# Altium PCB PCB1.PcbDoc
Units mil, origin at the board's own origin, x right, y up, seen from the top; angles counter-clockwise.
Board outline 8140 x 3030 mil, 2 copper layers (Top Layer, Bottom Layer); 79 components, 76 nets, 312 pads, 10 vias.
Unrouted connection lines stored in the file: 2.
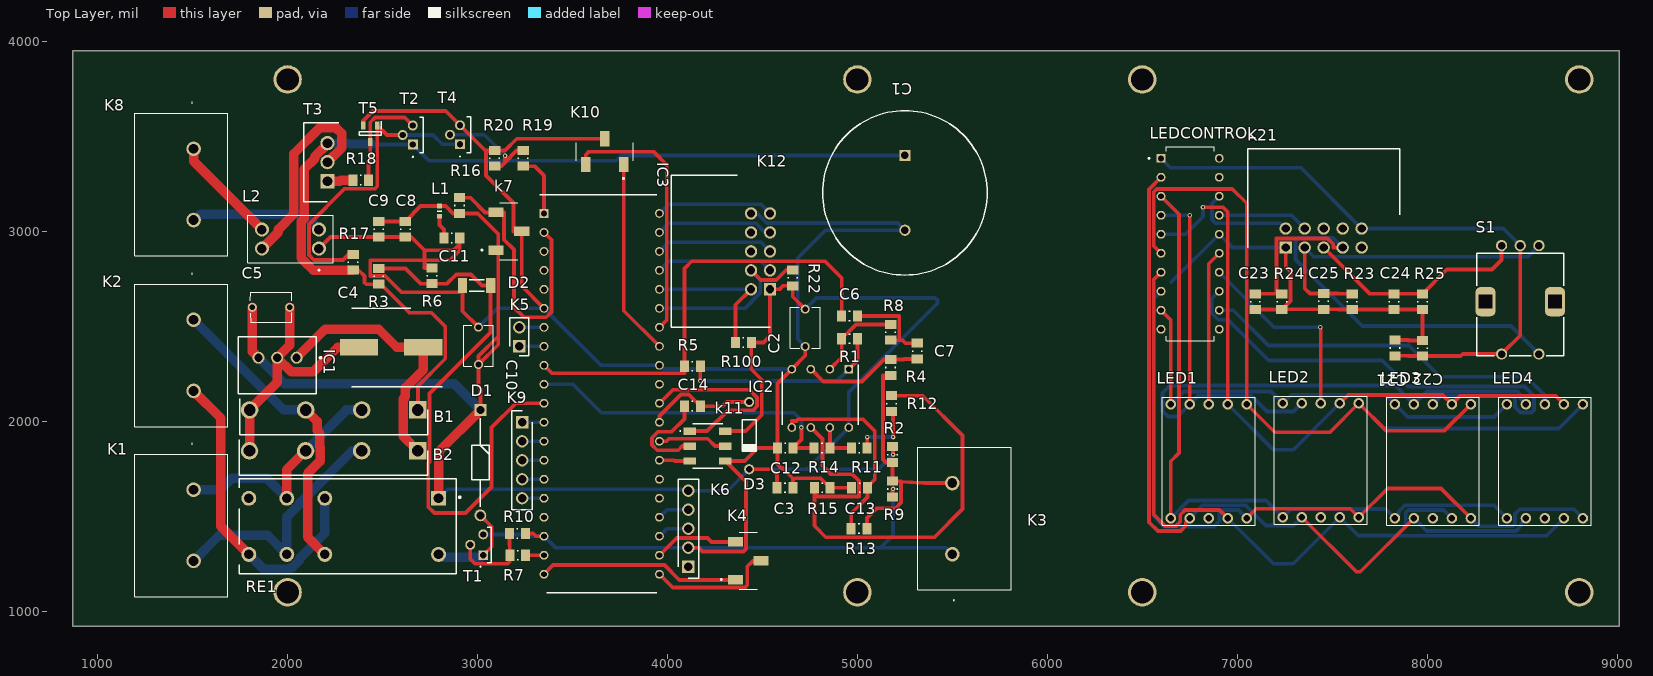
[diagram p0: Top Layer view]
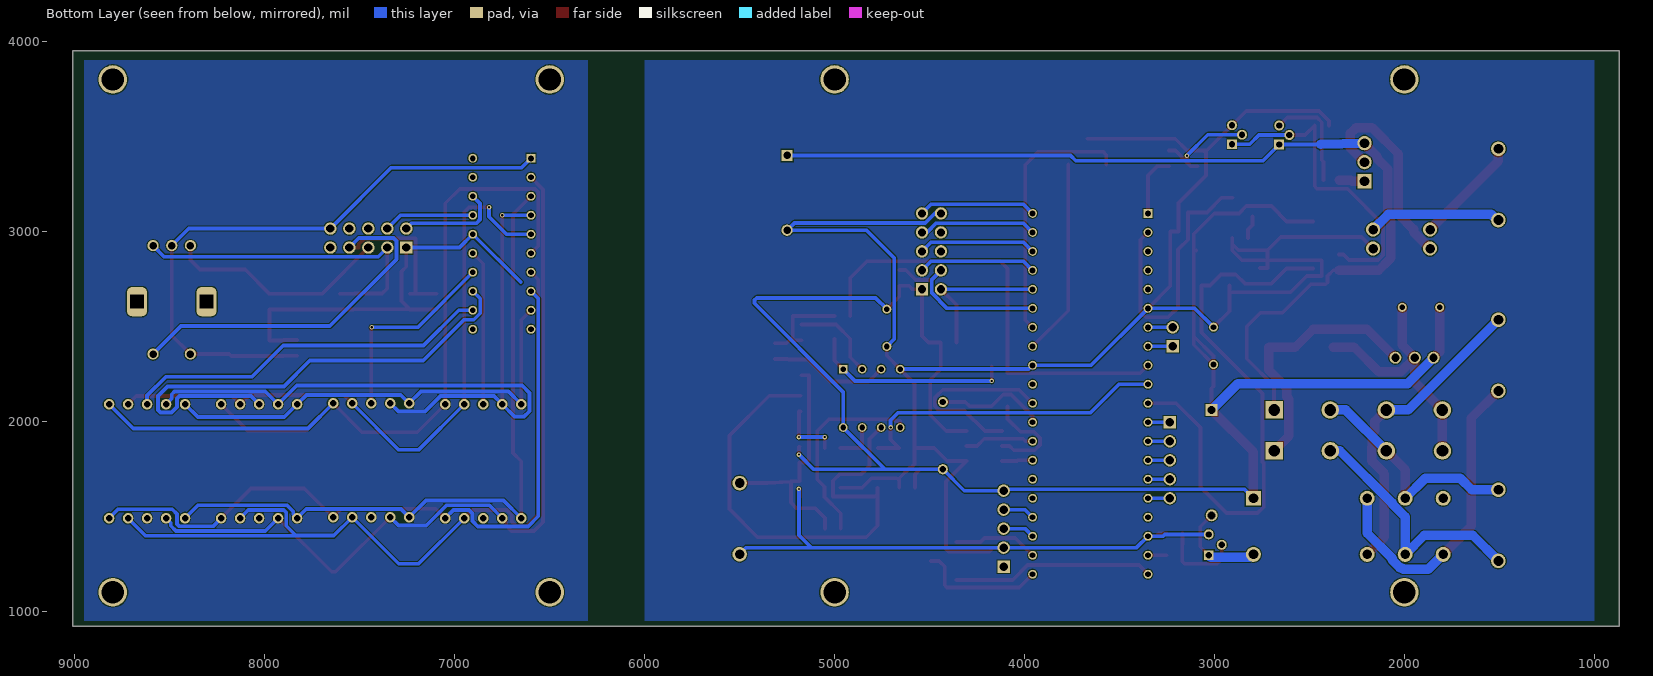
[diagram p1: Bottom Layer view, seen from below]
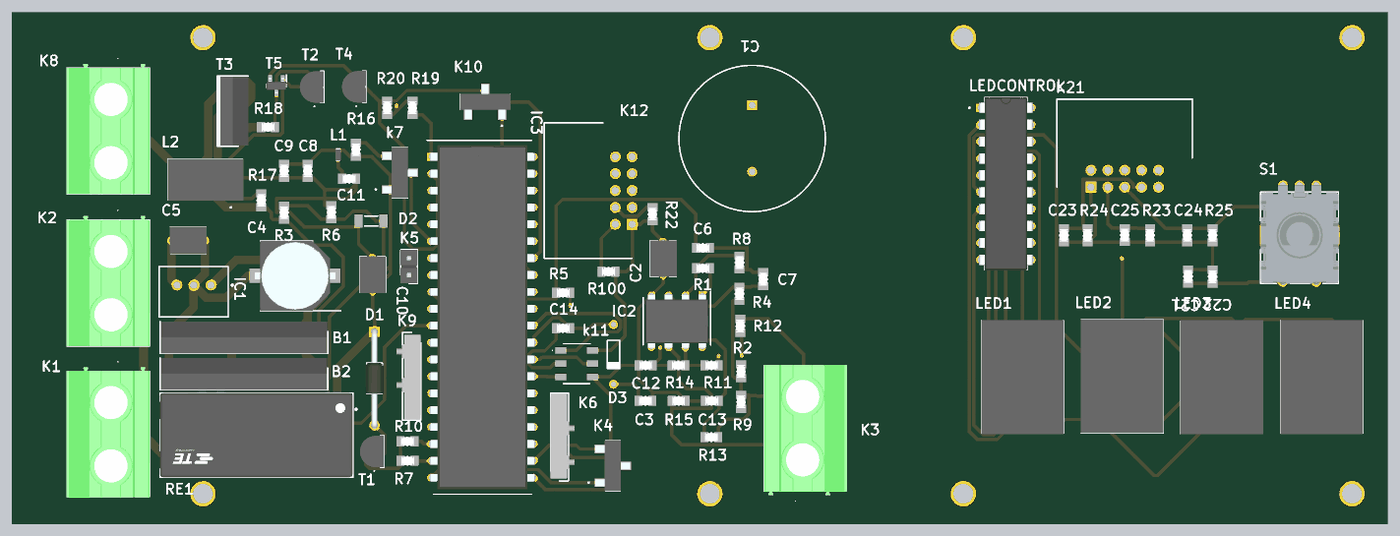
[diagram p2: 3D render of the assembled board from above, using the file's embedded part models]

## Layer stack, top to bottom
Top Solder: solder mask 0.4, Solder Resist, Dk 3.5
Top Layer: signal copper 1.4
Dielectric 1: dielectric 12.6, FR-4, Dk 4.8
Bottom Layer: signal copper 1.4
Bottom Solder: solder mask 0.4, Solder Resist, Dk 3.5

## Board outline
870,920 9010,920 9010,3950 870,3950

## Design rules (kind name [scope] priority, off if disabled: settings)
BoardOutlineClearance [All] p1: gap=7.87 ignorepadtopadclearanceinfootprint=FALSE
Clearance [All] p1: gap=5 ignorepadtopadclearanceinfootprint=FALSE except(9.84: Arc-Hole Track-Hole SMDPad-Hole THPad-Hole Via-Hole Fill-Hole Poly-Hole Region-Hole Text-Hole)
ComponentClearance [All] p1: gap=5 collisioncheckmode=3 verticalgap=5 showdistances=TRUE
DiffPairsRouting [All] p1: maxlimit=10 minlimit=5 mostfreqgap=5 toplayer_minwidth=5 toplayer_maxwidth=1000 toplayer_prefwidth=5 bottomlayer_minwidth=5 bottomlayer_maxwidth=1000 bottomlayer_prefwidth=5 maxuncoupledlength=500
Height [All] p1: minheight=0 maxheight=71497.94 prefheight=500
HoleSize [All] p1: absolutevalues=TRUE maxlimit=248.03 minlimit=11.81 maxpercent=80.000 minpercent=20.000
HoleToHoleClearance [All] p1: gap=9.84 allowstackedmicrovias=FALSE
MinimumAnnularRing [All] p1: minimumring=3
MinimumSolderMaskSliver [All] p1: minsoldermaskwidth=0
PlaneClearance [All] p1: clearance=5
PlaneConnect PlaneConnectPowerPads [InPadClass('PowerPads')] p1: planeconnectstyle=Direct reliefexpansion=20 reliefentries=4 reliefconductorwidth=10 reliefairgap=10
PlaneConnect [All] p2: pad.planeconnectstyle=Relief pad.reliefexpansion=11.81 pad.reliefentries=4 pad.reliefconductorwidth=5 pad.reliefairgap=5 via.planeconnectstyle=Direct via.reliefexpansion=11.81 via.reliefentries=4 via.reliefconductorwidth=5 via.reliefairgap=5
PolygonConnect PolygonConnectPowerPads [All vs (InPadClass('PowerPads'))] p1: connectstyle=Direct reliefconductorwidth=10 reliefentries=4 polygonreliefangle="90 Angle" airgapwidth=10
PolygonConnect [All] p2: thpad.connectstyle=Relief thpad.reliefconductorwidth=5 thpad.reliefentries=4 thpad.polygonreliefangle="90 Angle" thpad.airgapwidth=5 smdpad.connectstyle=Relief smdpad.reliefconductorwidth=5 smdpad.reliefentries=4 smdpad.polygonreliefangle="90 Angle" smdpad.airgapwidth=5 via.connectstyle=Direct via.reliefconductorwidth=5 via.reliefentries=4 via.polygonreliefangle="90 Angle" via.airgapwidth=5
RoutingVias [All] p1: holewidth=11.81 width=23.62 viastyle="Through Hole" minholewidth=11.81 minwidth=23.62 maxholewidth=23.62 maxwidth=259.84
SilkToSilkClearance [All] p1: silktosilkclearance=0
SilkToSolderMaskClearance [IsPad] p1: minsilkscreentomaskgap=5 clearancetoexposedcopper=TRUE
SolderMaskExpansion [All] p1: expansion=2.95 istentingtop=FALSE
Width [All] p1: maxlimit=1000 minlimit=15 preferedwidth=20 minimp=50.000000 maximp=50.000000 favimp=50.000000
20 further rules are at their usual default settings.

## Classes and differential pairs
component class led: C21 C22 C23 C24 C25 K21 LED1 LED2 LED3 LED4 LEDCONTROL R23 R24 R25 S1
component class input: B1 B2 C1 C4 C5 D1 D2 IC1 K1 K2 R3 R6 R7 R10 RE1 T1
component class controller: C8 C9 C10 C11 C14 D3 IC3 K4 K5 K6 k7 K9 K10 k11 K12 L1 R16 R21 R22 R100
component class bout: 12 C2 C3 C6 C7 C12 C13 IC2 K3 K8 L2 R1 R2 R4 R5 R8 R9 R11 R12 R13 R14 R15 R17 R18 R19 R20 T2 T3 T4 T5

## Components (designator, comment, footprint, x,y, rotation, side; value= is the part's Value field where it differs from the comment)
B1 "KBJ608G" TO750P480X2500X1900-4P 2685.83,2060 r180 top
B2 "KBJ608G" TO750P480X2500X1900-4P 2685.28,1845 r180 top
C1 "4700u 50V" CAPPRD1000W80D2200H3700 5250,3400 r270 top
C2 "10uF" RCE7U2J103J3K1H03B 4725,2590 r270 top
C3 "100n" FP-CRCW0805-e3-IPC_A 4618.63,1650 r0 top
C4 "100uF" CAPAE1050X1050N 2545,2390 r180 top
C5 "10uF" RCE7U2J103J3K1H03B 1815,2600 r0 top
C6 "10n" FP-CRCW0805-e3-IPC_A 4958.63,2555 r0 top
C7 "10n" FP-CRCW0805-e3-IPC_A 5315,2370 r90 top
C8 "100n" FP-CRCW0805-e3-IPC_A 2620,3011.37 r270 top
C9 "100n" FP-CRCW0805-e3-IPC_A 2480,3011.37 r270 top
C10 "10uF" RCE7U2J103J3K1H03B 3005,2300 r90 top
C11 "100n" FP-CRCW0805-e3-IPC_A 2865,2965 r0 top
C12 "10n" FP-CRCW0805-e3-IPC_A 4620,1860 r180 top
C13 "10n" FP-CRCW0805-e3-IPC_A 5011.37,1650 r180 top
C14 "100n" FP-CRCW0805-e3-IPC_A 4131.37,2080 r180 top
C21 "100n" FP-CRCW0805-e3-IPC_A 7830,2386.37 r270 top
C22 "100U 50V" FP-CRCW0805-e3-IPC_A 7975,2385 r270 top
C23 "10n" FP-CRCW0805-e3-IPC_A 7095,2630 r90 top
C24 "10n" FP-CRCW0805-e3-IPC_A 7825,2630 r90 top
C25 "10n" FP-CRCW0805-e3-IPC_A 7455,2631.37 r90 top
D1 "1N4007" DIOAD1408W86L464D236 3015,2060.12 r270 top
D2 "TZMC5V1-GS08" TZMC5V1GS08 2995,2715 r180 top
D3 "1N4148" NXP-SOD27-2_V 4430,1925 r270 top
IC1 "OKI-78SR-5/1.5-W36-C" MURA-OKI-78SR-3 1945,2335 r180 top
IC2 "MCP6002-I_P" DIP781W56P254L950H533Q8N 4805,2121.26 r270 top
IC3 "ATMEGA4809-PF" DIP1543W58P254L5175H635Q40N 3653.74,2145 r0 top
K1 "1714971" 1714971 1505,1640 r270 top
K2 "1714971" 1714971 1505,2534.8 r270 top
K3 "1714971" 1714971 5500,1300.2 r90 top
K4 "10129380-903001ALF" 10129380903001ALF 4425,1265 r90 top
K5 "M20-9990245" HDRV2W64P0X254_1X2_508X254X864P 3220,2395 r90 top
K6 "825433-5" HDRV5W63P0X254_1X5_1270X254X970P 4110,1235 r90 top
k7 "10129380-903001ALF" 10129380903001ALF 3165,3000 r90 top
K8 "1714971" 1714971 1505,3434.8 r270 top
K9 "825433-5" HDRV5W63P0X254_1X5_1270X254X970P 3235,1995 r270 top
K10 "10129380-903001ALF" 10129380903001ALF 3670,3420 r180 top
k11 "M22-5320305R" M225320305R 4211.5,1870 r270 top
K12 "61201021721" SHDRRA10W64P254X254_2X5_2036X885X910P 4540,2695 r90 top
K21 "61201021721" SHDRRA10W64P254X254_2X5_2036X885X910P 7255,2915 r0 top
L1 "LQM18FN1R0M00D" LQM18FN100M00D 2800,3106.57 r90 top
L2 "CM2545X171B-10" CM2545X171B10 2165,2910 r90 top
LED1 "HDSP-511A" HDSP511A 7050,2090 r180 top
LED2 "HDSP-511A" HDSP511A 7640,2095 r180 top
LED3 "HDSP-511A" HDSP511A 8230,2090 r180 top
LED4 "HDSP-511A" HDSP511A 8820,2090 r180 top
LEDCONTROL "TM1637" DIP778W43P254L2612H431Q20N 6751.85,2935 r0 top
R1 "18K" FP-CRCW0805-e3-IPC_A 4958.63,2435 r180 top
R2 "1M" FP-CRCW0805-e3-IPC_A 5185,1825 r270 top
R3 "4,7K" FP-CRCW0805-e3-IPC_A 2480,2763.63 r270 top
R4 "5K6" FP-CRCW0805-e3-IPC_A 5175,2283.63 r270 top
R5 "5K6" FP-CRCW0805-e3-IPC_A 4131.37,2290 r0 top
R6 "10K" FP-CRCW0805-e3-IPC_A 2760,2766.37 r90 top
R7 "10K" FP-CRCW0805-e3-IPC_A 3211.37,1295 r0 top
R8 "100" FP-CRCW0805-e3-IPC_A 5175,2468.63 r270 top
R9 "10M" FP-CRCW0805-e3-IPC_A 5185,1643.63 r270 top
R10 "4.7K" FP-CRCW0805-e3-IPC_A 3210,1410 r0 top
R11 "18K" FP-CRCW0805-e3-IPC_A 5010,1860 r0 top
R12 "18K" FP-CRCW0805-e3-IPC_A 5180,2093.63 r90 top
R13 "5K6" FP-CRCW0805-e3-IPC_A 5008.63,1435 r0 top
R14 "5K6" FP-CRCW0805-e3-IPC_A 4813.63,1860 r0 top
R15 "100" FP-CRCW0805-e3-IPC_A 4815,1650 r0 top
R16 "1M" FP-CRCW0805-e3-IPC_A 2905,3136.37 r270 top
R17 "4K7" FP-CRCW0805-e3-IPC_A 2345,2837 r90 top
R18 "100" FP-CRCW0805-e3-IPC_A 2385,3270 r180 top
R19 "10K" FP-CRCW0805-e3-IPC_A 3240,3385 r90 top
R20 "4K7" FP-CRCW0805-e3-IPC_A 3090,3385 r90 top
R22 "4,7K" FP-CRCW0805-e3-IPC_A 4660,2755 r270 top
R23 "10K" FP-CRCW0805-e3-IPC_A 7605,2630 r90 top
R24 "10K" FP-CRCW0805-e3-IPC_A 7235,2630 r90 top
R25 "10K" FP-CRCW0805-e3-IPC_A 7975,2630 r90 top
R100 "10K" FP-CRCW0805-e3-IPC_A 4400,2415 r0 top
RE1 "RT424005F" FP-RT424005F-MFG 2316.65,1447.36 r180 top
S1 "482009514001" 4820xx514001 8490,2630 r90 top
T1 "BC547CBU" BC547CBU#1 3015,1300 r90 top
T2 "BC547CBU" BC547CBU#2 2659.15,3458 r90 top
T3 "IRF9Z34NPBF" TO254P469X1042X1967-3P 2210,3265 r90 top
T4 "BC547CBU" BC547CBU#2 2908,3459 r90 top
T5 "BCX71K,215" SOT95P230X110-3N 2435,3515 r270 top

## Footprints (in the part's own frame and the unit in brackets; to place one, negate y for a bottom-side part, rotate by r counter-clockwise, add the part's x,y. Pads: shape width x height; smd on the part's side, far side on the other; paste and mask are expansions set on the pad)
4820xx514001 [mm] "20 pulse with 20 Detent, half  cut shaft with Bushing, THT vertical  Encoder, with switch Function"
  round 1.5 hole 1: 1(-7,-2.5) 2(-7,2.5) A(7.5,-2.5) B(7.5,2.5) C(7.5,0)
  rrect50% 3.9x2.7 hole 1.8 square: S1(0,4.65) S2(0,-4.65)
  silkscreen extent -7.25,-5.85 6.5,5.85, body extent -7.3,-5.85 7.6,5.85, height 26.65
1714971 [mm]
  round 1.95 hole 1.3: 1(0,0) 2(9.52,0)
  silkscreen extent -6.2,-7.9 14.28,4.6, body extent -5.32,-7.95 14.29,4.55, height 21.5
10129380903001ALF [mm]
  rect 1.27x2.03 smd: 1(-2.54,1.715) 2(0,-1.715) 3(2.54,1.715)
  silkscreen extent -3.81,-1.2 3.81,3.7, body extent -3.81,-2.6 3.81,2.6, height 9.95
BC547CBU#1 [mil]
  rect 52.48x52.48 hole 32.28: 1(-5,-15)
  round 52.48 hole 32.28: 2(50,53.15) 3(105,-15)
  silkscreen extent -67,-56 144,2, body extent -44,-56 144,86, height 214
BC547CBU#2 [mil]
  rect 52.48x52.48 hole 32.28: 1(0,0)
  round 52.48 hole 32.28: 2(50,53.15) 3(100,0)
  silkscreen extent -67,-56 144,2, body extent -44,-56 144,86, height 214
CAPAE1050X1050N [mm]
  rect 5.1x2.15 smd: 1(-4.3,0) 2(4.3,0)
  silkscreen extent -6.85,-5.25 5.25,5.25, body extent -6.05,-5.25 6.05,5.25, height 10.5
CAPPRD1000W80D2200H3700 [mm]
  rect 1.5x1.5 hole 1: 1(0,0)
  round 1.5 hole 1: 2(10,0)
  silkscreen extent -6,-11 16,11
CM2545X171B10 [mil]
  round 75 hole 50: 1(0,0) 2(100,0) 3(100,300) 4(0,300)
  silkscreen extent -118,-74 174,374, body extent -74,-74 174,374, height 378
DIOAD1408W86L464D236 [mm]
  rect 1.575x1.575 hole 1.05: 1(0,0)
  round 1.575 hole 1.05: 2(14.1,0)
  silkscreen extent 1.14,-1.18 12.96,1.18, body extent -0.43,-1.36 14.51,1.36, height 2.71
DIP778W43P254L2612H431Q20N [mm]
  rect 1.19x1.19 hole 0.79: 1(-3.89,11.43)
  round 1.19 hole 0.79: 2(-3.89,8.89) 3(-3.89,6.35) 4(-3.89,3.81) 5(-3.89,1.27) 6(-3.89,-1.27) 7(-3.89,-3.81) 8(-3.89,-6.35) 9(-3.89,-8.89) 10(-3.89,-11.43) 11(3.89,-11.43) 12(3.89,-8.89) 13(3.89,-6.35) 14(3.89,-3.81) 15(3.89,-1.27) 16(3.89,1.27) 17(3.89,3.81) 18(3.89,6.35) 19(3.89,8.89) 20(3.89,11.43)
  silkscreen extent -5.58,-13 3.2,13, body extent -4.03,-13 4.03,13, height 4.31
DIP781W56P254L950H533Q8N [mm]
  rect 1.159x1.159 hole 0.759: 1(-3.905,3.81)
  round 1.159 hole 0.759: 2(-3.905,1.27) 3(-3.905,-1.27) 4(-3.905,-3.81) 5(3.905,-3.81) 6(3.905,-1.27) 7(3.905,1.27) 8(3.905,3.81)
  silkscreen extent -4.48,-5.08 3.56,5.08, body extent -4.05,-4.75 4.05,4.75, height 5.33
DIP1543W58P254L5175H635Q40N [mm]
  rect 1.184x1.184 hole 0.784: 1(-7.715,24.13)
  round 1.184 hole 0.784: 2(-7.715,21.59) 3(-7.715,19.05) 4(-7.715,16.51) 5(-7.715,13.97) 6(-7.715,11.43) 7(-7.715,8.89) 8(-7.715,6.35) 9(-7.715,3.81) 10(-7.715,1.27) 11(-7.715,-1.27) 12(-7.715,-3.81) 13(-7.715,-6.35) 14(-7.715,-8.89) 15(-7.715,-11.43) 16(-7.715,-13.97) 17(-7.715,-16.51) 18(-7.715,-19.05) 19(-7.715,-21.59) 20(-7.715,-24.13) 21(7.715,-24.13) 22(7.715,-21.59) 23(7.715,-19.05) 24(7.715,-16.51) 25(7.715,-13.97) 26(7.715,-11.43) 27(7.715,-8.89) 28(7.715,-6.35) 29(7.715,-3.81) 30(7.715,-1.27) 31(7.715,1.27) 32(7.715,3.81) 33(7.715,6.35) 34(7.715,8.89) 35(7.715,11.43) 36(7.715,13.97) 37(7.715,16.51) 38(7.715,19.05) 39(7.715,21.59) 40(7.715,24.13)
  silkscreen extent -8.31,-26.61 7.37,26.61, body extent -7.86,-25.88 7.86,25.88, height 6.35
FP-CRCW0805-e3-IPC_A [mil]
  rect 47.5x59.38 smd paste+0 mask+0: 1(-41.37,0) 2(41.37,0)
  silkscreen extent -3,-25 3,25, body extent -85,-49 85,49, height 10
FP-RT424005F-MFG [mm]
  round 2 hole 1.3 paste-1000 mask+0: 11(8.15,-3.75) 12(3.07,-3.75) 14(13.23,-3.75) 21(8.15,3.75) 22(3.07,3.75) 24(13.23,3.75) A2(-12.15,3.75)
  rect 2x2 hole 1.3 paste-1000 mask+0: A1(-12.15,-3.75)
  silkscreen extent -15.1,-6.35 14.5,6.35, body extent -14.6,-6.45 14.6,6.45, height 0.25
HDRV2W64P0X254_1X2_508X254X864P [mm]
  rect 1.65x1.65 hole 1.1: 1(0,0)
  round 1.65 hole 1.1: 2(2.54,0)
  silkscreen extent -1.27,-1.27 3.81,1.27, body extent -1.27,-1.27 3.81,1.27, height 8.64
HDRV5W63P0X254_1X5_1270X254X970P [mm]
  rect 1.65x1.65 hole 1.1: 1(0,0)
  round 1.65 hole 1.1: 2(2.54,0) 3(5.08,0) 4(7.62,0) 5(10.16,0)
  silkscreen extent -1.52,-1.37 11.68,1.37, body extent -1.16,-2.28 11.54,1.37, height 9.5
HDSP511A [mm]
  round 1.414 hole 0.87: 1(0,0) 2(2.54,0) 3(5.08,0) 4(7.62,0) 5(10.16,0) 6(10.16,15.24) 7(7.62,15.24) 8(5.08,15.24) 9(2.54,15.24) 10(0,15.24)
  silkscreen extent -1.12,-0.93 11.28,16.17, body extent -1.12,-0.93 11.28,16.17, height 8.1
LQM18FN100M00D [mm]
  rect 0.65x0.7 smd: 1(-0.675,0) 2(0.675,0)
  silkscreen extent 0,-0.3 0,0.3, body extent -0.93,-0.4 0.93,0.4, height 1
M225320305R [mm]
  rect 1x1.65 smd: 1(-2,-2.375) 2(-2,2.375) 3(0,-2.375) 4(0,2.375) 5(2,-2.375) 6(2,2.375)
  silkscreen extent -3,-3.7 3,2
MURA-OKI-78SR-3 [mm] "THMT, 3-Leads, Body 10.4x7.6mm"
  round 1.6 hole 1.1: 1(-2.6,0) 2(0,0) 3(2.5,0)
  silkscreen extent -5.92,-2.8 5.2,4.8, body extent -5.2,-2.8 5.2,4.8, height 16.5
NXP-SOD27-2_V [mm] "SOD27, 2-Leads, Dia 1.85mm, Body Length 4.25mm, Pin Spacing 9mm"
  round 1.35 hole 0.85: 1(-4.5,0) 2(4.5,0)
  silkscreen extent -2.13,-0.93 2.13,0.93, body extent -4.78,-0.92 4.78,0.92, height 1.84
RCE7U2J103J3K1H03B [mm]
  round 1.2 hole 0.75: 1(-0.02,0) 2(4.98,0)
  silkscreen extent -0.27,-2 5.23,2, body extent -0.29,-2 5.26,2, height 7.6
SHDRRA10W64P254X254_2X5_2036X885X910P [mm]
  rect 1.65x1.65 hole 1.1: 1(0,0)
  round 1.65 hole 1.1: 2(0,2.54) 3(2.54,0) 4(2.54,2.54) 5(5.08,0) 6(5.08,2.54) 7(7.62,0) 8(7.62,2.54) 9(10.16,0) 10(10.16,2.54)
  silkscreen extent -5.1,0 15.26,13.23
SOT95P230X110-3N [mm]
  rect 1.05x0.6 smd: 1(-1.1,0.95) 2(-1.1,-0.95) 3(1.1,0)
  silkscreen extent -1.62,-1.45 0.22,1.5, body extent -1.15,-1.45 1.15,1.45, height 1.1
TO254P469X1042X1967-3P [mm]
  rect 1.92x1.92 hole 1.28: 1(0,0)
  round 1.92 hole 1.28: 2(2.54,0) 3(5.08,0)
  silkscreen extent -2.73,-1.49 7.81,3.2, body extent -2.67,-1.5 7.75,3.19, height 18.84
TO750P480X2500X1900-4P [mm]
  rect 2.34x2.34 hole 1.56: 1(0,0)
  round 2.34 hole 1.56: 2(7.5,0) 3(15,0) 4(22.5,0)
  silkscreen extent -1.35,-1.5 23.85,3.3, body extent -1.25,-1.5 23.75,3.3, height 18.5
TZMC5V1GS08 [mm]
  rect 1.25x2 smd: 1(-1.875,0) 2(1.875,0)
  silkscreen extent -1,-0.75 1,0.75

## Part data
B1 B2: "Bridge Rectifier", Manufacturer_Name="Diodes Inc.", Mouser2 Part Number=621-KBJ608G, Datasheet Link=https://componentsearchengine.com//KBJ608G.pdf, Height=4.8mm, Manufacturer_Part_Number=KBJ608G, Mouser2 Price/Stock=https://www.mouser.com/Search/Refine.aspx?Keyword=621-KBJ608G
C1 C3 C4 C6 C7 C8 C9 C11 C12 C13 C14 C21 C22 C23 C24 C25: library part MAL215097101E3, "Capacitor Polarised", Manufacturer_Name=Vishay, Datasheet Link=https://componentsearchengine.com/Datasheets/2/MAL215097101E3.pdf, Height=10.5mm, Manufacturer_Part_Number=MAL215097101E3
C2 C5 C10: library part Component_1
D1: library part 1N4007-T, "Diode", Manufacturer_Name=Rectron, Mouser2 Part Number=583-1N4007-T, Datasheet Link=https://componentsearchengine.com//1N4007-T.pdf, Manufacturer_Part_Number=1N4007-T, Mouser2 Price/Stock=https://www.mouser.com/Search/Refine.aspx?Keyword=583-1N4007-T
D2: "Zener Diode", Manufacturer_Name=Vishay, Datasheet Link=https://componentsearchengine.com/Datasheets/2/TZMC5V1-GS08.pdf, Height=1.6mm, Manufacturer_Part_Number=TZMC5V1-GS08
D3: library part CMP-0648-00002-1, "High-speed Diode, 100 V, 450 mA, 2-Pin SOD27, RoHS", Manufacturer="NXP Semiconductors", Cd="4 pF Max.", ComponentLink1Description="Manufacturer URL", ComponentLink1URL=http://www.nxp.com/, ComponentLink2Description=Datasheet, ComponentLink2URL=http://www.nxp.com/documents/data_sheet/1N4148_1N4448.pdf, ComponentLink3Description="Package Specification", ComponentLink3URL=http://www.nxp.com/documents/data_sheet/1N4148_1N4448.pdf, Configuration=Single, DatasheetVersion=Aug-04, IF="200 mA Max.", IFRM="450 mA", IFSM="4 A Max.", IR (VR="20 V)=25 nA", Mounting Technology="Through Hole", PackageDescription="2-Pin Hermetically Sealed Glass Package, Axial Leaded, Dia 1.85 mm, Body Length 4.25 mm, Lead Spread 25.4 mm", PackageReference=SOD27, PackageVersion=Aug-04, PartNumber=1N4148, RoHS=TRUE, Trr="4 ns Max.", VF (IF="10 mA)=1 V", VR="100 V Max."
IC1: library part CMP-2000-05274-1, "Non-Isolated DC/DC Converter, 7.5 W, 7 to 36 V, 1.5 A, -40 to 85 degC, 3-Pin THD, RoHS", Current - Output (Max)=1.5A, Manufacturer=Murata, Operating Temperature=-40degC~85degC, Package / Case=3-SIPModule, Power (Watts) - Manufacture Series=8W, Voltage - Input (Max)=36V, Voltage - Input (Min)=7V, Voltage - Isolation=-, Voltage - Output 1=5V, Applications=ITE(Commercial), Category=PowerSupplies-BoardMount, Datasheet URL=https://datasheet.ciiva.com/8006/1790439-8006672.pdf, Datasheet Version=Oct-13, Efficiency=90.5%, Family=DCDCConverters, Features=SCP, Manufacturer URL=http://www.murata.com/, Mounting Type=ThroughHole, Number of Outputs=1, Packaging=Tube, Power (Watts) - Max=8W, Series=Okami™OKI-78SR, Size / Dimension="0.41\"Lx0.30\"Wx0.65\"H(10.4mmx7.6mmx16.5mm)", Type=LinearRegulatorReplacement, Voltage - Output 2=-, Voltage - Output 3=-
IC2: "Integrated Circuit", Manufacturer_Name=Microchip, Manufacturer_Part_Number=MCP6002-I/P, Mouser2 Part Number=579-MCP6002-I/P, Datasheet Link=https://componentsearchengine.com//MCP6002-I_P.pdf, Height=5.334mm, Mouser2 Price/Stock=https://www.mouser.com/Search/Refine.aspx?Keyword=579-MCP6002-I%2FP
IC3: "Integrated Circuit", Manufacturer_Name=Microchip, Mouser2 Part Number=556-ATMEGA4809-PF, Datasheet Link=https://componentsearchengine.com//ATMEGA4809-PF.pdf, Height=6.35mm, Manufacturer_Part_Number=ATMEGA4809-PF, Mouser2 Price/Stock=https://www.mouser.com/Search/Refine.aspx?Keyword=556-ATMEGA4809-PF
K1 K2 K3 K8: "Connector", Manufacturer_Name="Phoenix Contact", Datasheet Link=https://componentsearchengine.com/Datasheets/2/1714971.pdf, Height=21.7mm, Manufacturer_Part_Number=1714971
K4 k7 K10: "Connector", Manufacturer_Name=Amphenol, Datasheet Link=https://cdn.amphenol-icc.com/media/wysiwyg/files/documentation/datasheet/boardwiretoboard/bwb_econostik_254headers.pdf, Height=9.85mm, Manufacturer_Part_Number=10129380-903001ALF
K5: "Connector", Manufacturer_Name=Harwin, Mouser2 Part Number=855-M20-9990245, Datasheet Link=https://componentsearchengine.com//M20-9990245.pdf, Height=8.64mm, Manufacturer_Part_Number=M20-9990245, Mouser2 Price/Stock=https://www.mouser.com/Search/Refine.aspx?Keyword=855-M20-9990245
K6 K9: "Connector", Manufacturer_Name="TE Connectivity", Mouser2 Part Number=571-825433-5, Datasheet Link=https://componentsearchengine.com//825433-5.pdf, Height=9.7mm, Manufacturer_Part_Number=825433-5, Mouser2 Price/Stock=https://www.mouser.com/Search/Refine.aspx?Keyword=571-825433-5
k11: "Connector", Manufacturer_Name=Harwin, Datasheet Link=https://cdn.harwin.com/pdfs/M22-532R.pdf, Height=7.3mm, Manufacturer_Part_Number=M22-5320305R
K12 K21: "Connector", Manufacturer_Name="Wurth Elektronik", Mouser2 Part Number=710-61201021721, Datasheet Link=https://componentsearchengine.com//61201021721.pdf, Height=9.1mm, Manufacturer_Part_Number=61201021721, Mouser2 Price/Stock=https://www.mouser.com/Search/Refine.aspx?Keyword=710-61201021721
L1: "Inductor", Manufacturer_Name="Murata Electronics", Datasheet Link=https://psearch.en.murata.com/inductor/product/LQM18FN1R0M00%23.html, Height=0.9mm, Manufacturer_Part_Number=LQM18FN1R0M00D
L2: "Transformer", Manufacturer_Name="Laird Technologies", Datasheet Link=https://datasheet.datasheetarchive.com/originals/dk/DKDS-7/122753.pdf, Height=9.5mm, Manufacturer_Part_Number=CM2545X171B-10
LED1 LED2 LED3 LED4: "Display", Manufacturer_Name="Avago Technologies", Mouser2 Part Number=630-HDSP-511A, Datasheet Link=https://datasheet.datasheetarchive.com/originals/distributors/SFDatasheet-4/sf-00083626.pdf, Height=8mm, Manufacturer_Part_Number=HDSP-511A, Mouser2 Price/Stock=https://www.mouser.com/Search/Refine.aspx?Keyword=630-HDSP-511A
LEDCONTROL: "LED Drive Control Special Circuit", Package=Package, Availability="Not in stock", Check_prices=https://www.snapeda.com/parts/TM1637/Titan+Micro+Electronics/view-part/?ref=eda, MF="Titan Micro Electronics", MP=TM1637, Price=None, SnapEDA_Link=https://www.snapeda.com/parts/TM1637/Titan+Micro+Electronics/view-part/?ref=snap
R1 R2 R3 R4 R5 R6 R7 R8 R9 R10 R11 R12 R13 R14 R15 R16 R17 R18 R19 R20 R22 R23 R24 R25 R100: library part CHP0805AFX-1000ELF, "Resistor", Manufacturer_Name=Bourns, Datasheet Link=https://www.mouser.cn/datasheet/2/54/chp-a-1858677.pdf, Height=0.6mm, Manufacturer_Part_Number=CHP0805AFX-1000ELF
RE1: library part CMP-03395-000296-1, "RELAY GENERAL PURPOSE DPDT 8A 5V", Coil Current=80.6mA, Coil Power=500mW, Coil Resistance=62R, Coil Voltage (DC)=5V, Contact Current Rating=8A, Contact Voltage Rating (AC)=250V, Dropout Voltage=500mV, Max Operating Temperature=85°C, Max Voltage Rating (AC)=400V, Min Operating Temperature=-40°C, Package Quantity=5000, Power Consumption=400mW, Coil Type=Non-Latching, Contact Material=Silver, ELV=Compliant, Height=15.7mm, Lead Free="Lead Free", Length=29mm, Mount="Through Hole", Operate Time=7ms, Packaging=Carton, Radiation Hardening=No, Relay Type="General Purpose", Release Time=3ms, RoHS Compliant=Yes, Series=RT2, Termination=PCB, Throw Configuration=DPDT, Weight=13g, Width=12.7mm
S1: "WS-ENTV Mechanical Incremental Encoder Switch, Metal Shaft with bushing, 8Pulse/360deg, 16positions, 10mA", Insulation Resistance=100MOhm, Manufacturer="Wurth Elektronik", Operating Temperature="-40 to +85degC", Rated Current=10mA, ComponentLink1Description=Manufacturer, ComponentLink1URL=http://www.we-online.de, ComponentLink2Description=Datasheet, ComponentLink2URL=https://www.we-online.com/catalog/datasheet/482009514001.pdf, Detent=16positions, Electrical Life Encoder=15000Cycles, Electrical Life Switch=20000Cycles, Manufacturer Part Number=482009514001, Mounting Technology=THT, Operation Force=600g, Packaging=Tray, Published Date="May 2021", Resolution=8Pulse/360deg, Size=L13.75W11.7H26.6
T1 T2 T4: "Transistor BJT NPN", Manufacturer_Name="ON Semiconductor", Datasheet Link=https://www.onsemi.com/pdf/datasheet/bc550-d.pdf, Height=5.33mm, Manufacturer_Part_Number=BC547CBU
T3: "MOSFET (P-Channel)", Manufacturer_Name=Infineon, Mouser2 Part Number=942-IRF9Z34NPBF, Datasheet Link=https://componentsearchengine.com//IRF9Z34NPBF.pdf, Height=4.69mm, Manufacturer_Part_Number=IRF9Z34NPBF, Mouser2 Price/Stock=https://www.mouser.com/Search/Refine.aspx?Keyword=942-IRF9Z34NPBF
T5: "Transistor BJT PNP", Manufacturer_Name=Nexperia, Datasheet Link=http://assets.nexperia.com/documents/data-sheet/BCX71.pdf, Height=1.1mm, Manufacturer_Part_Number=BCX71K,215

## Free pads (board coordinates)
  round 150 hole 118.11: 6(2000,3800) 7(2000,1100) 8(5000,1100) 10(5000,3800) 12(6500,3800) 13(6500,1100) 14(8800,1100) 15(8800,3800)

## Via types
v1: diameter 23.62, hole 11.81, Top Layer to Bottom Layer, 10 vias

## Nets (pads, with @x,y where several pads share a name; then routed paths per layer and width w, separated by ;. In a path a pad name is that pad's centre, name@x,y a point inside that pad or via, vN(x,y) a via of type N, cw(c..) or ccw(c..) an arc to the next point about the centre after c; other vN are vias at no path point)
+5: C2.1 C3.1 C5.1 C8.1 C9.1 C10.1 C21.1 C22.1 C23.1 C24.1 C25.1 D1.1 D3.2 IC1.3 IC2.8 K6.5 k7.1 k11.2 K12.1 K21.1 L1.2 LEDCONTROL.16 R2.1 R16.2 R22.2 R23.1 R24.1 R25.1 R100.2 RE1.A1 | length 12237.9
  Top Layer w20: C9.1 C8.1 2700.41,3133.15 L1.2 2833,3133.15 2871.15,3095 R16.2 3001,3095 3109,2987 k7.1@3109,2900 ; D1.1 3015,2174 3005,2184 C10.1 ; k7.1 k7.1@3109,2900 ; k11.2 4411.82,1948.74 4496.58,2033.49 4496.58,2218.8 4441.37,2274 R100.2 4505,2415 4540,2450 K12.1 4590,2695 4608.63,2713.63 R22.2 4660,2655.79 C2.1 ; D3.2 4550,1747.83 4577.26,1720.58 C3.1 ; R2.1 5188,1866.37 v1(5188,1825) ; C23.1 R24.1 ; K21.1 7255,2814 7280,2789 7280,2633.63 R24.1 ; C21.1 7901,2427.74 7902.37,2426.37 C22.1 R25.1 C24.1 R23.1 7531.37,2588.63 C25.1 7346.37,2590 R24.1 ; C10.1 3109,2403.21 3109,2448 ; C10.1 3005,2344 3109,2448 ; 3109,2448 k7.1@3109,2900
  Top Layer w50: C5.1 1814.21,2367.36 IC1.3 ; RE1.A1 2795,1840.12 D1.1
  Bottom Layer w20: RE1.A1 2843,1643 4110,1643 K6.5 4317.17,1635 D3.2 4735.31,1747.83 ; C2.1 4784.21,2650 5410,2650 5421.72,2638.28 5421.72,2621.72 4955,2155 IC2.8 4735.31,1747.83 ; v1(5188,1825) 5110.83,1747.83 4735.31,1747.83 ; 6652,2732 LEDCONTROL.16 6975,2915 K21.1
  Bottom Layer w50: IC1.3 1982.57,2199 2876.12,2199 D1.1
GND: C1.2 C2.2 C3.2 C8.2 C9.2 C10.2 C11.2 C12.2 C13.2 C21.2 C22.2 D2.2 IC2.4 IC3.6 IC3.18 IC3.32 K3.1 K6.2 k7.2 K10.2 k11.6 K12.10 K21.10 L2.1 LEDCONTROL.1 R6.2 R9.2 R10.2 R15.2 R20.2 S1.2 S1.C T1.3 T4.3 T5.2 | length 17112
  Top Layer w20: L2.1 2225,2970 C9.2 C8.2 2651,2970 2720,2901 ; T5.2 2397.6,3581.79 2450,3634.2 2832.8,3634.2 T4.3 3040.63,3426.37 3058.87,3426.37 ; R6.2 2721,2807.74 2720.57,2848 ; C11.2 2906.37,2933.37 ; D2.2 D2.2@2921.18,2680 ; C10.2 2921.18,2579.88 D2.2@2921.18,2680 ; R10.2 3293,1410 3308,1395 IC3.18 ; IC3.6 3232.52,2712.48 k7.2 3189.5,3000 3189.5,3149.5 3045,3294 3045,3412.5 3058.87,3426.37 ; K10.2 3206.15,3487.52 3145,3426.37 R20.2 3058.87,3426.37 ; K6.2 4165,1335 4185,1315 4400,1315 4413,1328 4413,1683.26 k11.6 4407,1791.26 4475.74,1860 C12.2 ; C3.2 4660,1687.5 ; C2.2 4725,2345 IC2.4 4578.63,2198.63 C12.2 ; C13.2 R15.2 4806.37,1700 4672.5,1700 4660,1687.5 ; R9.2 5185,1641 v1(5188,1644) ; C21.2 7901,2345 7902.37,2343.63 C22.2 8177,2343.63 8187.78,2354.41 S1.2 8490,2452.84 S1.C ; 2720,2901 2720.57,2848 ; 2720,2901 2875,2902 2906.37,2933.37 ; 2720.57,2848 2854.37,2848 2906.37,2900 2906.37,2933.37 ; 2720.57,2848 2435,2848 2435,2766 2514,2766 2600,2680 D2.2@2921.18,2680 ; C12.2 4578.63,1775 4598.63,1755 4605,1755 4660,1700 4660,1687.5
  Bottom Layer w20: C10.2 3103.94,2595 IC3.6 3650,2295 IC3.32 3977.48,2275 IC2.4 ; T1.3 3261,1405 3271,1395 IC3.18 3410,1335 K6.2 5123,1335 ; K12.10 4472.85,3095 4522.85,3045 5211.3,3045 C1.2 4832.3,3006.3 4686,2860 4686,2432.94 C2.2 ; v1(5188,1644) 5188,1400 5123,1335 ; K3.1 5465.2,1335 5123,1335 ; LEDCONTROL.1 6648.7,3335 7335,3335 K21.10 8400.28,3015 S1.C
NetB1_2: B1.2 B2.3 K1.1 RE1.11 | length 1235
  Top Layer w50: RE1.11 1995.79,1746.06 B2.3
  Bottom Layer w50: K1.1 1645,1640 1705,1700 1890.79,1700 RE1.11 ; B2.3 2309.72,2060 B1.2
NetB1_3: B1.3 K2.1 RE1.22 | length 1643.4
  Top Layer w50: B1.3 2156,1999.28 2156,1949.21 2170,1935.21 2170,1863.86 2170.79,1863.07 2170.79,1790.79 2105,1725 2105,1390.51 RE1.22
  Bottom Layer w50: K2.1 1979.8,2060 B1.3
NetB1_4: B1.4 B2.4 C4.2 C5.2 IC1.2 | length 1358.3
  Top Layer w20: 1799.45,1952 1800,1952.55
  Top Layer w50: B2.4 1799.45,1952 ; 1800,1952.55 B1.4 1945,2205 IC1.2 ; C5.2 2011.06,2401.06 IC1.2 ; C4.2 2264,2390 2134,2260 2020,2260 IC1.2
NetB2_1: B2.1 C4.1 IC1.1 | length 1388
  Top Layer w50: IC1.1 2197.36,2485 2480,2485 2575,2390 C4.1 2714.29,2271.29 2620,2177 2620,2128.73 2609.76,2118.49 2609.76,1920.51 B2.1
NetB2_2: B2.2 K1.2 RE1.21 | length 1326
  Bottom Layer w50: K1.2 1639.8,1400 1895.51,1400 RE1.21 1995.79,1496.9 2065.16,1566.27 2065.16,1570.16 2340,1845 B2.2
NetC6_1: C6.1 IC3.9 R5.1 | length 2388.7
  Top Layer w20: IC3.9 3392,2253 4090,2253 R5.1 4090,2805 4128,2843 4829,2843 4917.26,2754.74 C6.1
NetC6_2: C6.2 C7.2 R8.2 | length 494.3
  Top Layer w20: C6.2 5220,2555 5220,2427.26 ; R8.2 5220,2427.26 ; C7.2 5252.88,2411.37 5237,2427.26 5220,2427.26
NetC7_1: C7.1 IC2.3 R4.1 | length 636.1
  Top Layer w20: IC2.3 4820,2210 5025,2210 5140,2325 R4.1 5243,2325 5246.63,2328.63 C7.1
NetC11_1: C11.1 L1.1 | length 124.8
  Top Layer w20: L1.1 2800,3033.63 2823.63,3010 C11.1
NetC12_1: C12.1 IC3.10 R14.1 | length 1708.2
  Top Layer w20: v1(4705,1968) 4705,1903.63 C12.1 R14.1
  Bottom Layer w20: IC3.10 3503,2195 3653,2045 4666,2045 4705,2006 v1(4705,1968)
NetC13_1: C13.1 IC2.5 R13.1 | length 1065.7
  Top Layer w20: IC2.5 4655,2002 4679,2002 4688,2011 5030,2011 5091,1950 5091,1694.26 5052.74,1656 C13.1 5052.74,1602 4967.26,1516.51 R13.1
NetC14_1: C14.1 D3.1 IC3.29 | length 586.5
  Top Layer w20: IC3.29 3957.48,2027.48 4071,2141 4111.74,2141 C14.1 4290,2080 4312.17,2102.17 D3.1
NetC14_2: C14.2 k11.3 | length 537.3
  Top Layer w20: C14.2 4090,2013 4022,1945 3950,1945 3919,1914 3919,1875 3946,1848 4057,1848 4079,1870 k11.3
NetC23_2: C23.2 K21.7 R24.2 S1.1 | length 2669.9
  Top Layer w20: C23.2 R24.2@7207,2671.37 ; R24.2 R24.2@7207,2671.37 ; K21.7 7505,2915 7505,2933 7475,2963 7207,2963 R24.2@7207,2671.37
  Bottom Layer w20: K21.7 7505,2965 7322,2965 7307,2950 7307,2853 7658,2502 8440.84,2502 S1.1
NetC24_2: C24.2 K21.5 R25.2 S1.B | length 1186.8
  Top Layer w20: K21.5 7698.63,2671.37 C24.2 R25.2 8102.63,2799 8340.57,2799 8391.57,2850 S1.B
NetC25_2: C25.2 K21.3 R23.2 S1.A | length 1754.3
  Top Layer w20: K21.3 7355,2700 7382.26,2672.74 C25.2 7529,2672.74 7530.37,2671.37 R23.2
  Bottom Layer w20: K21.3 7403,2867 8530.15,2867 S1.A
NetD1_2: D1.2 RE1.A2 T1.1 | length 498.7
  Top Layer w20: D1.2 3075,1445 3075,1340 T1.1
  Bottom Layer w50: RE1.A2 2802.78,1299.72 2817.5,1285 3020,1285 T1.1
NetD2_1: D2.1 IC3.11 R3.1 R6.1 | length 3012.9
  Top Layer w20: R3.1 2620,2805 2700,2725 R6.1 2840,2725 2888,2773 2966,2773 3024,2715 D2.1 3068.82,2467.82 2747,2146 2747,1785 2740,1778 2740,1550 2773,1517 2936,1517 3074,1655 3074,1967 3202,2095 IC3.11
NetIC2_1: IC2.1 R1.1 R5.2 | length 1063.6
  Top Layer w20: v1(4172.74,2213) R5.2 ; IC2.1 5000,2320 R1.1
  Bottom Layer w20: v1(4172.74,2213) 4893,2213 IC2.1
NetIC2_2: IC2.2 R1.2 R8.1 | length 474.6
  Top Layer w20: IC2.2 4917.26,2337.26 R1.2 4992.26,2510 R8.1
NetIC2_6: IC2.6 R12.2 R15.1 | length 2690.1
  Top Layer w20: IC2.6 4816,1906.52 4816,1766 4861,1721 4975,1721 5009,1687 5009,1605 4787.5,1605 4773.63,1618.87 ; R15.1 4773.63,1618.87 ; R12.2 5344,2135 5554,1925 5554,1538 5406,1390 4833.63,1390 4773.63,1450 4773.63,1618.87
NetIC2_7: IC2.7 R11.1 R14.2 | length 221.1
  Top Layer w20: IC2.7 R14.2 R11.1
NetIC3_1: IC3.1 R19.1 | length 329.3
  Top Layer w20: R19.1 3300,3343.63 3350,3293.63 IC3.1
NetIC3_2: IC3.2 k7.3 R16.1 | length 1454.6
  Top Layer w20: R16.1 2962,3177.74 3039.74,3100 k7.3 3140,3100 3140,2956 3192,2904 3192,2600 3244,2548 3362,2548 3389,2575 3389,2956 IC3.2
NetIC3_7: IC3.7 K5.2 | length 130
  Bottom Layer w20: K5.2 IC3.7
NetIC3_8: IC3.8 K5.1 | length 130
  Bottom Layer w20: K5.1 IC3.8
NetIC3_12: IC3.12 K9.1 | length 115
  Bottom Layer w20: K9.1 IC3.12
NetIC3_13: IC3.13 K9.2 | length 115
  Bottom Layer w20: K9.2 IC3.13
NetIC3_14: IC3.14 K9.3 | length 115
  Bottom Layer w20: K9.3 IC3.14
NetIC3_15: IC3.15 K9.4 | length 115
  Bottom Layer w20: K9.4 IC3.15
NetIC3_16: IC3.16 K9.5 | length 115
  Bottom Layer w20: K9.5 IC3.16
NetIC3_19: IC3.19 R7.2 | length 97.3
  Top Layer w20: R7.2 IC3.19
NetIC3_20: IC3.20 K4.1 | length 1059.7
  Top Layer w20: IC3.20 3398,1243 3984,1243 4062,1165 K4.1
NetIC3_21: IC3.21 K4.2 | length 679.1
  Top Layer w20: IC3.21 4027.48,1125 4407.5,1125 4420,1137.5 4420,1235 4450,1265 K4.2
NetIC3_22: IC3.22 K4.3 | length 446.4
  Top Layer w20: IC3.22 4048.48,1386 4210.07,1386 4231.07,1365 K4.3
NetIC3_23: IC3.23 K6.3 | length 169.1
  Bottom Layer w20: IC3.23 3997.48,1435 K6.3
NetIC3_24: IC3.24 K6.4 | length 169.1
  Bottom Layer w20: IC3.24 3997.48,1535 K6.4
NetIC3_27: IC3.27 k11.5 | length 162.1
  Top Layer w20: IC3.27 4035,1795 4038.74,1791.26 k11.5
NetIC3_28: IC3.28 k11.4 | length 368.6
  Top Layer w20: IC3.28 3994.48,1895 4007.48,1908 4212,1908 4250,1870 k11.4
NetIC3_30: IC3.30 k11.1 | length 1013.7
  Top Layer w20: IC3.30 4028.48,2166 4430.58,2166 4471.58,2125 4471.58,2079.58 4450,2058 4318.26,2058 4209,1948.74 k11.1
NetIC3_33: IC3.33 K10.1 | length 1035.1
  Top Layer w20: K10.1 3770,2582.48 IC3.33
NetIC3_34: IC3.34 K10.3 | length 1383.2
  Top Layer w20: K10.3 3570,3402.5 3587.5,3420 3926,3420 3996,3350 3996,2533.52 IC3.34
NetIC3_35: IC3.35 K12.4 R22.1 | length 966.4
  Top Layer w20: K12.4 4491,2744 4573,2744 4625.37,2796.37 R22.1
  Bottom Layer w20: IC3.35 4408,2595 4488,2675 4488,2747 K12.4
NetIC3_36: IC3.36 K12.2 R100.1 | length 796.2
  Top Layer w20: R100.1 4358.63,2613.63 K12.2
  Bottom Layer w20: IC3.36 K12.2
NetIC3_37: IC3.37 K12.3 | length 622.3
  Bottom Layer w20: IC3.37 4005.48,2843 4492,2843 K12.3
NetIC3_38: IC3.38 K12.5 | length 622.3
  Bottom Layer w20: IC3.38 4005.48,2943 4492,2943 K12.5
NetIC3_39: IC3.39 K12.7 | length 622.3
  Bottom Layer w20: IC3.39 4005.48,3043 4466,3043 4514,2995 K12.7
NetIC3_40: IC3.40 K12.9 | length 622.3
  Bottom Layer w20: IC3.40 4005.48,3143 4492,3143 K12.9
NetK2_2: K2.2 RE1.12 RE1.24 | length 1680.7
  Top Layer w50: K2.2 1649,2016 1649,1446.51 RE1.24
  Bottom Layer w50: RE1.24 1873.51,1222 2007,1222 2015.35,1230.35 2024.52,1230.35 2065.16,1270.99 2065.16,1280.16 2195.79,1410.79 RE1.12
NetK3_2: K3.2 R2.2 R4.2 R9.1 R13.2 | length 1381.9
  Top Layer w20: R13.2 5050,1492 5100,1542 5200,1542 5230,1572 5230,1682.31 ; R4.2 5135,2242.26 5135,1798.63 5150,1783.63 R2.2 R9.1 ; K3.2 5352,1675 5230,1682.31 ; R9.1 5230,1682.31 ; R9.1 5230,1685 5230,1682.31
NetK8_1: K8.1 L2.3 | length 573.9
  Top Layer w50: K8.1 1505,3370 L2.3
NetK8_2: K8.2 L2.2 | length 705.6
  Bottom Layer w50: K8.2 1512.24,3060 1542.24,3090 2085,3090 L2.2
NetK21_2: K21.2 LEDCONTROL.18 | length 546.5
  Bottom Layer w20: LEDCONTROL.18 6866.57,3146.57 6866.57,3062.5 6886.07,3043 7227,3043 K21.2
NetK21_4: K21.4 LEDCONTROL.17 | length 479
  Bottom Layer w20: LEDCONTROL.17 7285,3085 K21.4
NetL2_4: L2.4 T3.2 | length 1071.4
  Top Layer w50: L2.4 1951.45,2996.45 1951.45,3010.8 2032,3091.35 2032,3409 2168,3545 2255.71,3545 2285,3515.71 2285,3440 T3.2
NetLED1_1: LED1.1 LED2.1 LED3.1 LED4.1 LEDCONTROL.6 | length 4633.3
  Top Layer w20: LEDCONTROL.6 6560.27,2923.43 6560.27,3208.27 6576,3224 6974,3224 7050,3148 LED1.1 7197,1943 7488,1943 LED2.1 7784,1951 8091,1951 LED3.1
  Bottom Layer w20: LED2.1 7772,1963 8693,1963 LED4.1
NetLED1_2: LED1.2 LED2.2 LED3.2 LED4.2 LEDCONTROL.5 | length 3506.8
  Top Layer w20: v1(6819,3127) 6925,3127 6950,3102 LED1.2 ; LED2.2 7584,2139 8081,2139 LED3.2 8173,2133 8677,2133 LED4.2
  Bottom Layer w20: LEDCONTROL.5 6727,2985 6819,3077 v1(6819,3127) ; LED1.2 7190,1850 7295,1850 LED2.2
NetLED1_3: LED1.3 LEDCONTROL.15 | length 817.8
  Top Layer w20: LED1.3 6850,2830 LEDCONTROL.15
NetLED1_4: LED1.4 LED2.4 LED3.4 LED4.4 LEDCONTROL.4 | length 4122.8
  Top Layer w20: LED1.4 v1(6750,3085)
  Bottom Layer w20: LEDCONTROL.4 v1(6750,3085) ; LED2.4 7297,2052 7155.84,2052 7075,2132.84 6792.84,2132.84 LED1.4 6685,2025 6635,2025 6607,2053 6607,2150 6645,2188 7832,2188 LED3.4 7997.84,2157.84 8475,2157.84 8490.02,2142.81 8490.02,2119.98 LED4.4
NetLED1_5: LED1.5 LED2.5 LED3.5 LED4.5 LEDCONTROL.9 | length 2435.1
  Top Layer w20: LEDCONTROL.9 6650,2533.7 LED1.5
  Bottom Layer w20: LED1.5 6717.84,2157.84 7177.16,2157.84 LED2.5 7284,2139 7781,2139 LED3.5 7897.84,2022.16 8352.16,2022.16 LED4.5
NetLED1_6: LED1.6 LED2.6 LED3.6 LED4.6 LEDCONTROL.3 | length 3699.2
  Top Layer w20: LEDCONTROL.3 6693,3090.7 6693,1833 6650,1790 LED1.6
  Bottom Layer w20: LED1.6 6742.84,1582.84 7152.16,1582.84 LED2.6 7283,1538 7782,1538 LED3.6 7850.4,1510.4 7850.4,1525 7883.23,1557.84 8352.16,1557.84 LED4.6
NetLED1_7: LED1.7 LED2.7 LED3.7 LED4.7 LEDCONTROL.2 | length 4276.1
  Top Layer w20: LEDCONTROL.2 6535.27,3221.57 6535.27,1469.05 6582.16,1422.16 6701.38,1422.16 6729.22,1450 6729.22,1469.22 LED1.7 ; LED2.7 7627,1208 7648,1208 LED3.7
  Bottom Layer w20: LED1.7 6817.84,1557.84 7044.16,1557.84 7150,1452 7297,1452 LED2.7 ; LED3.7 7997.84,1422.16 8467.16,1422.16 8495,1450 8495,1465 LED4.7
NetLED1_9: LED1.9 LED2.9 LED3.9 LED4.9 LEDCONTROL.7 | length 4438.8
  Top Layer w20: LEDCONTROL.7 6560.27,2746.57 6560.27,1509.39 6622.5,1447.16 6675,1447.16 6700,1472.16 6700,1508 6725,1533 6907,1533 LED1.9
  Bottom Layer w20: LED1.9 7190,1250 7295,1250 LED2.9 7635,1400 7637.84,1400 ; LED3.9 8087.16,1532.84 7900,1532.84 7887,1519.84 7887,1450 7837,1400 7637.84,1400 ; LED4.9 8627.16,1397.16 7637.84,1397.16 7637.84,1400
NetLED1_10: LED1.10 LED2.10 LED3.10 LED4.10 LEDCONTROL.8 | length 3832
  Top Layer w20: LED1.10 7100,1540 7595,1540 LED2.10 7792,1647 8073,1647 LED3.10
  Bottom Layer w20: LEDCONTROL.8 6560,2646.3 6560,1500 6613,1447 6879,1447 6907,1475 6907,1514.84 6925,1532.84 7007.16,1532.84 LED1.10 ; LED3.10 8272.84,1447.16 8450,1447.16 8463,1460.16 8463,1512.5 8487.5,1537 8773,1537 LED4.10
NetLED2_3: LED2.3 LEDCONTROL.14 | length 1053.4
  Top Layer w20: v1(7437,2495) 7440,2492 LED2.3
  Bottom Layer w20: LEDCONTROL.14 7195,2495 v1(7437,2495)
NetLED3_3: LED3.3 LEDCONTROL.13 | length 2700.8
  Bottom Layer w20: LEDCONTROL.13 6866,2646 6866,2569 6900,2535 6951,2535 7166,2320 7763,2320 7899,2184 8512,2184 8563,2133 8563,2060 8550,2047 8490.84,2047 8462.84,2075 8462.84,2120 8450,2132.84 8072.84,2132.84 LED3.3
NetLED4_3: LED4.3 LEDCONTROL.12 | length 1946.8
  Bottom Layer w20: LEDCONTROL.12 6979,2585 7164,2400 7902.97,2400 8067.97,2235 8520.71,2235 8620,2135.71 LED4.3
NetR7_1: R7.1 R10.1 T1.2 | length 446.8
  Top Layer w20: T1.2 2961.85,1275 2986.85,1250 3157.5,1250 3170,1262.5 R7.1 3170,1351 3168.63,1352.37 R10.1
NetR11_2: R11.2 R12.1 | length 336.9
  Top Layer w20: R11.2 v1(5051.37,1917) ; R12.1 5188,2052.26 v1(5188,1917)
  Bottom Layer w20: v1(5051.37,1917) v1(5188,1917)
NetR17_2: R17.2 T2.2 T4.1 T5.1 | length 1658.9
  Top Layer w20: R17.2 2320.37,2878.37 2291,2849 2138,2849 2112,2875 2112,3037 2300,3225 2459.9,3225 2472.4,3237.5 T5.1 2522.71,3508 T2.2
  Bottom Layer w20: T2.2 2765,3508 2814,3459 T4.1
NetR18_1: R18.1 T2.3 T5.3 | length 560.5
  Top Layer w20: R18.1 2426.37,3366 2435,3374.63 T5.3 2435,3575 2460,3600 2617.15,3600 T2.3
NetR18_2: R18.2 T3.1 | length 135.7
  Top Layer w20: 2274,3265 2279,3270
  Top Layer w50: T3.1 2274,3265 ; 2279,3270 R18.2
NetR19_2: R19.2 R20.1 T4.2 | length 557.4
  Top Layer w20: R20.1 3126.13,3343.63 3145,3362.5 ; v1(3145,3399) 3145,3362.5 ; R19.2 3205.74,3426.37 3145,3362.5
  Bottom Layer w20: T4.2 3035,3509 v1(3145,3399)
VCC: B1.1 C1.1 R3.2 R17.1 T2.1 T3.3 | length 5177.2
  Top Layer w20: R17.1 2375,2795.63 2405.29,2765.34 2405.29,2730.99 2414.02,2722.26 R3.2 2491,2722.26 2641.26,2572 2758,2572 2830,2500 2830,2330 2685.83,2185.83 B1.1
  Top Layer w50: T3.3 2210,3460.88 2142.2,3393.08 2142.2,3382.2 2087,3327 2087,3068.57 2072,3053.57 2072,2858.43 2083.72,2846.72 2134.8,2795.63 R17.1
  Bottom Layer w20: 2441,3458 T2.1 2744.96,3372.19 3730,3372.19 3757.81,3400 C1.1
  Bottom Layer w50: T3.3 2441,3458
pads on no net: IC3.3 IC3.4 IC3.5 IC3.17 IC3.25 IC3.26 IC3.31 K6.1 K12.6 K12.8 K21.6 K21.8 K21.9 LED1.8 LED2.8 LED3.8 LED4.8 LEDCONTROL.10 LEDCONTROL.11 LEDCONTROL.19 LEDCONTROL.20 RE1.14 S1.S1 S1.S2

## Polygon pours and split planes (outlines as drawn)
GND on Bottom Layer "GND_L02_P003" (solid, pour order 3): 6300,3900 8950,3900 8950,950 6300,950
GND on Bottom Layer "GND_L02_P002" (solid, pour order 2): 1000,3900 6000,3900 6000,950 1000,950